# Altium PCB 水温控制系统PCB图.PcbDoc
Units mm, origin at the board's own origin, x right, y up, seen from the top; angles counter-clockwise.
Board outline 83.19 x 88.52 mm, 2 copper layers (Top Layer, Bottom Layer); 38 components, 45 nets, 151 pads, 0 vias.
Unrouted connection lines stored in the file: 2.
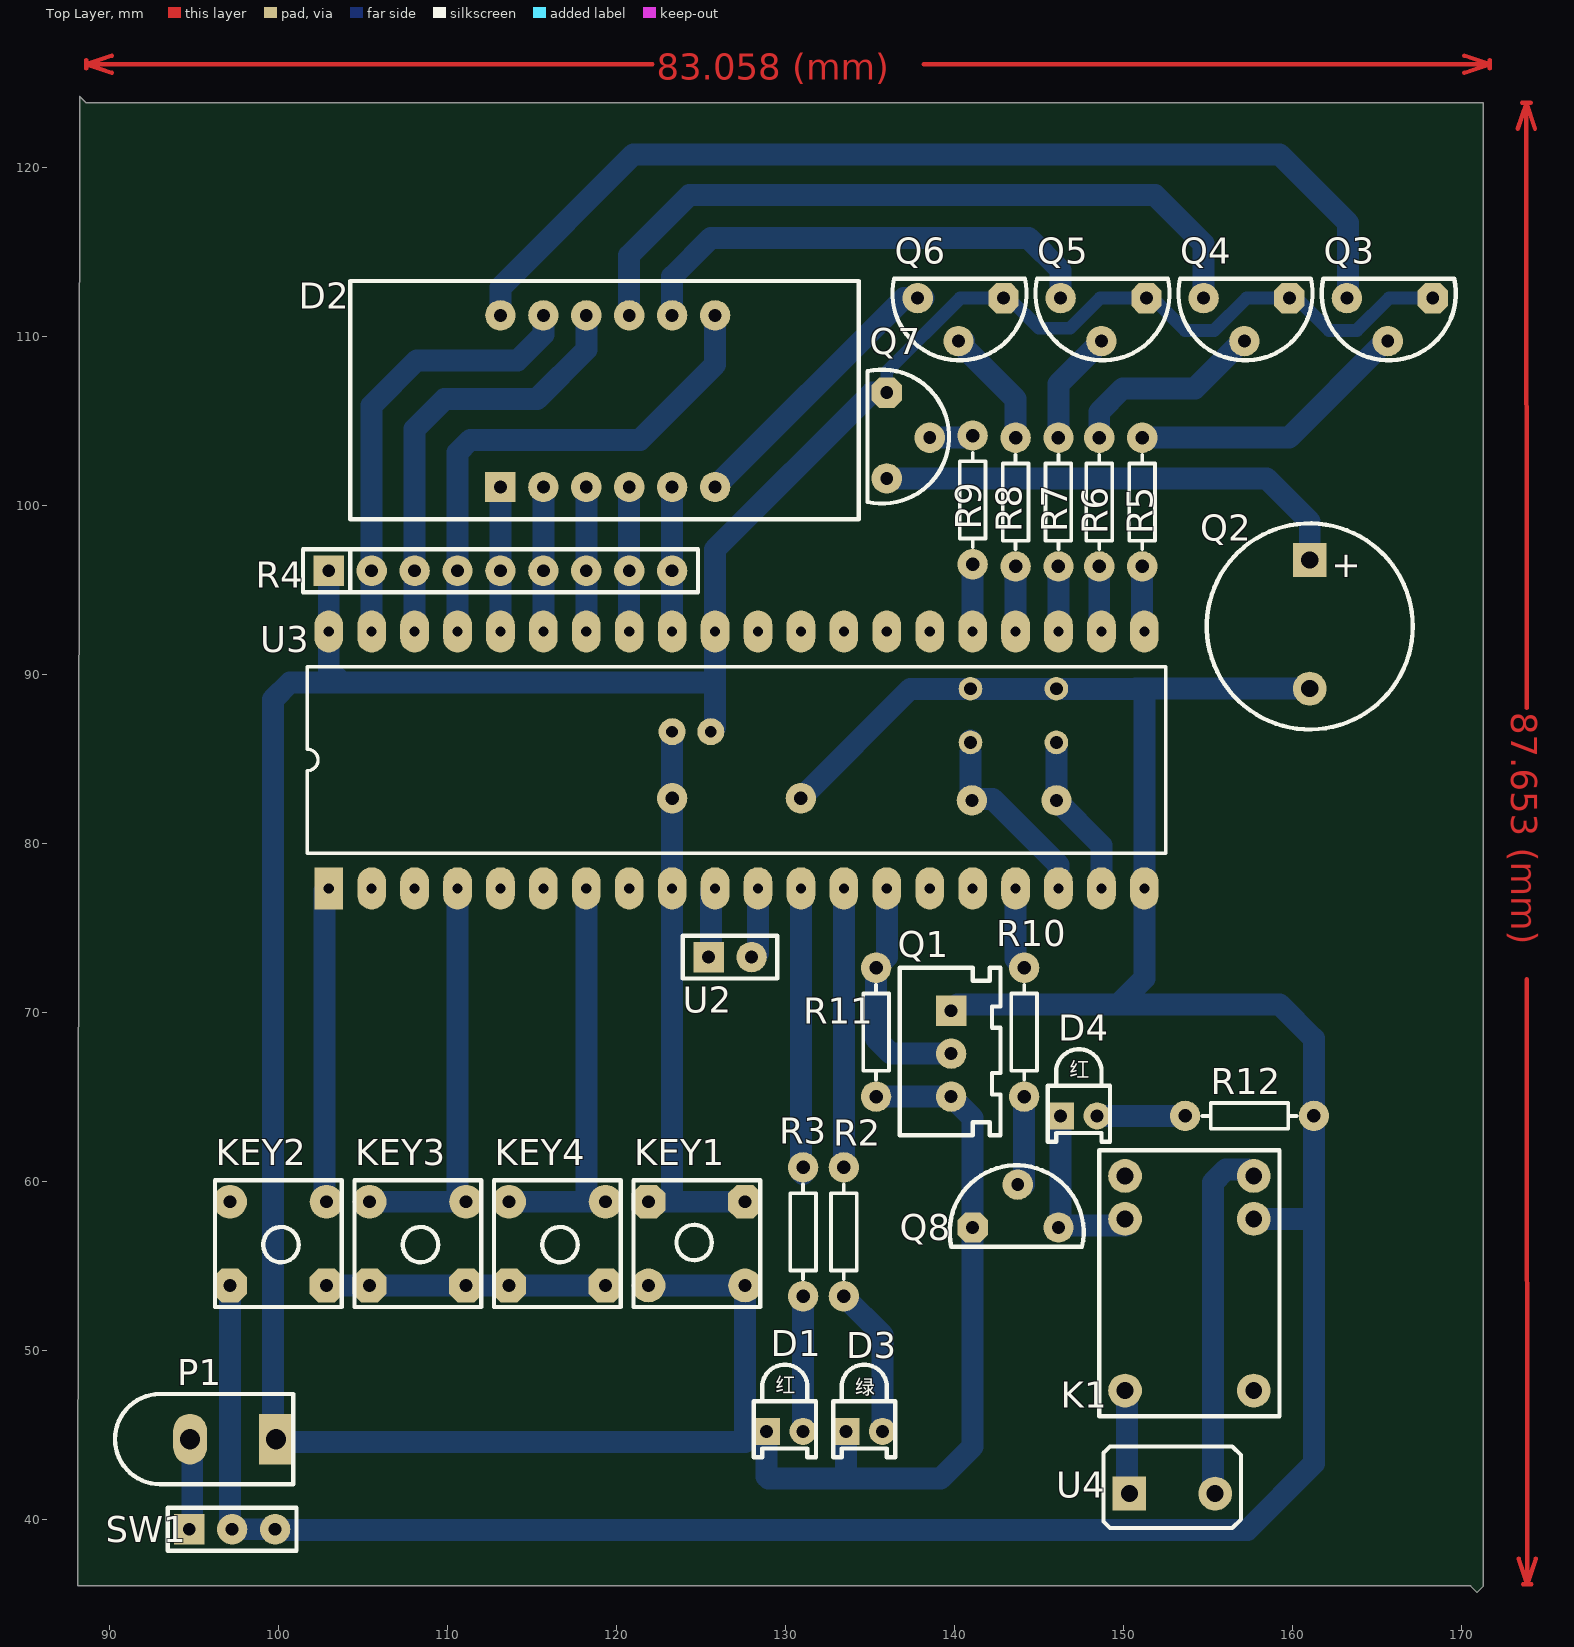
[diagram p0: Top Layer view]
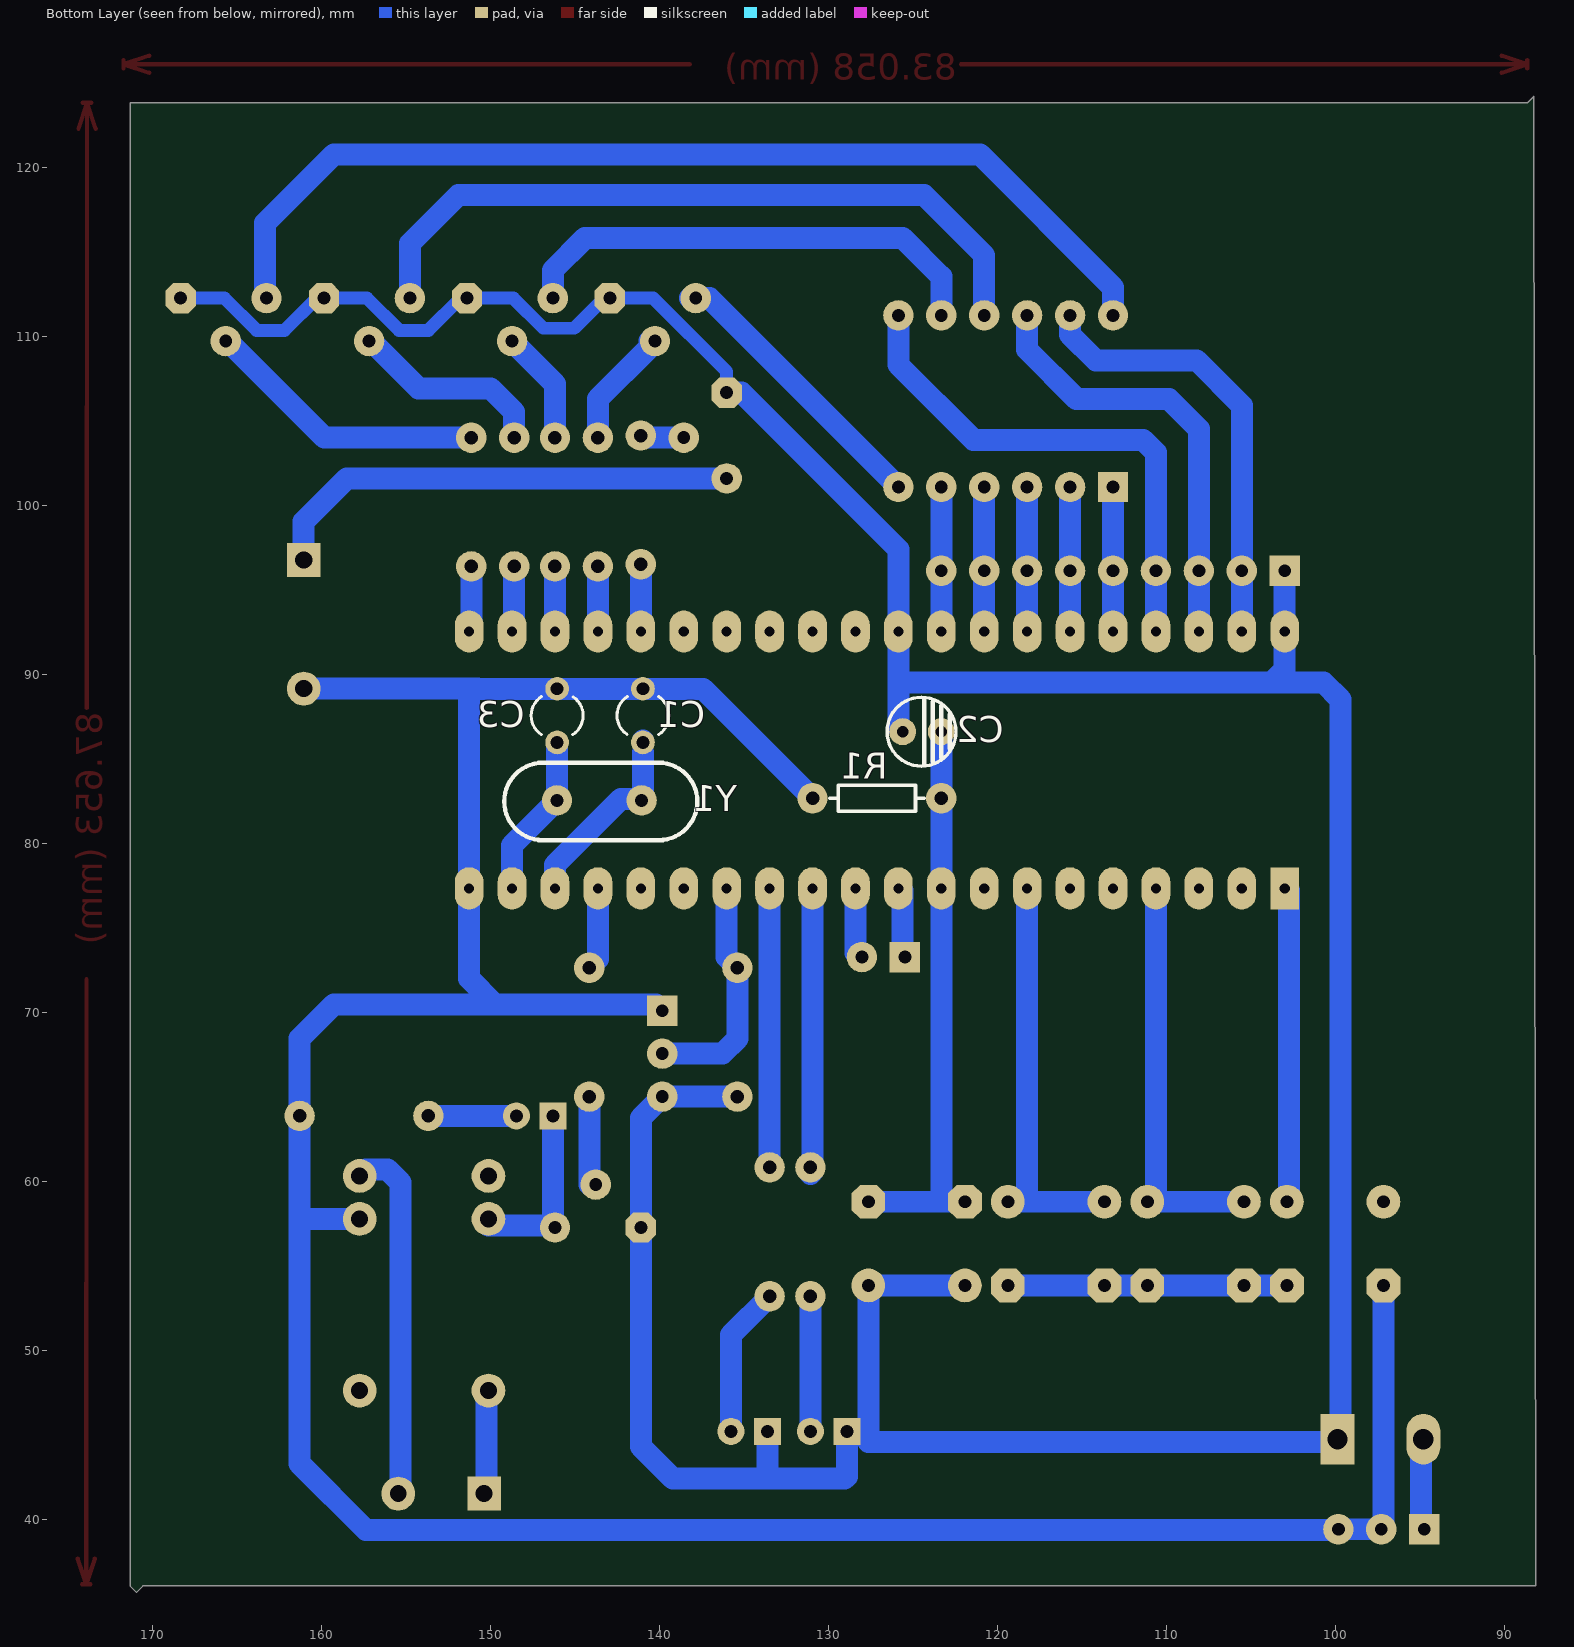
[diagram p1: Bottom Layer view, seen from below]

## Layer stack, top to bottom
Top Layer: signal copper 0.0356
Dielectric: dielectric 0.32, FR-4, Dk 4.8
Bottom Layer: signal copper 0.0356

## Board outline
88.265,124.206 88.646,123.825 171.323,123.825 171.323,36.068 170.942,35.687 170.561,36.068 88.138,36.068

## Design rules (kind name [scope] priority, off if disabled: settings)
Clearance [All] p1: gap=0.254
PolygonConnect [All] p1: connectstyle=Relief reliefconductorwidth=0.254 reliefentries=4 polygonreliefangle="90 Angle"
RoutingVias [All] p1: holewidth=0.711 width=1.27 viastyle="Through Hole" minholewidth=0.711 minwidth=1.27 maxholewidth=0.711 maxwidth=1.27
SilkscreenOverComponentPads [All] p1: minsilkscreentomaskgap=0.254
SolderMaskExpansion [All] p1: expansion=0.102
Width [All] p1: maxlimit=1.3 minlimit=0.254 preferedwidth=0.762 bottomlayer_minwidth=0.762 minimp=50.000000 maximp=50.000000 favimp=50.000000
27 further rules are at their usual default settings.

## Components (designator, comment, footprint, x,y, rotation, side; value= is the part's Value field where it differs from the comment)
C1 "30PF" R38 139.319,90.043 r0 bottom
C2 "10UF" CD4 122.301,88.773 r0 bottom
C3 "30PF" R38 147.701,85.09 r180 bottom
D1 "LED-RED" LED-RED 128.016,43.561 r0 top
D2 "4位数码管" 3641B 104.14,99.06 r0 top
D3 "LED-GREEN" LED-GREEN 132.715,43.561 r0 top (schematic designator D?)
D4 "LED-RED" LED-RED 145.415,62.23 r0 top
K1 "继电器HK4100F" HK4100F 159.258,46.101 r90 top
KEY1 "复位按键" SW 120.904,52.451 r0 top
KEY2 "设置键" SW 103.886,60.198 r180 top
KEY3 "加值键" SW 112.141,60.198 r180 top
KEY4 "减值键" SW 120.396,60.198 r180 top
P1 "DC-002" DC-002 91.618,38.659 r0 top
Q1 "DS18B20" XH3P 136.652,72.771 r270 top
Q2 "蜂鸣器" 蜂鸣器 161.036,96.774 r270 top
Q3 "S8550" 三极管 169.85,113.538 r180 top
Q4 "S8550" 三极管 161.366,113.538 r180 top
Q5 "S8550" 三极管 152.908,113.538 r180 top
Q6 "S8550" 三极管 144.45,113.538 r180 top
Q7 "S8550" 三极管 134.747,108.204 r270 top
Q8 "S8550" 三极管 139.573,56.007 r0 top
R1 "10K" AXIAL-0.3 131.953,81.661 r180 bottom
R2 "1K" AXIAL-0.3 132.461,61.849 r270 top
R3 "1K" AXIAL-0.3 130.048,61.849 r270 top
R4 "10k" R*9 101.346,94.742 r0 top
R5 "1K" AXIAL-0.3 152.146,95.377 r90 top
R6 "1K" AXIAL-0.3 149.606,95.377 r90 top
R7 "1K" AXIAL-0.3 147.193,95.377 r90 top
R8 "1K" AXIAL-0.3 144.653,95.377 r90 top
R9 "1K" AXIAL-0.3 142.113,95.504 r90 top
R10 "1K" AXIAL-0.3 145.161,64.008 r90 top
R11 "10K" AXIAL-0.3 134.366,73.66 r270 top
R12 "1K" AXIAL-0.3 162.306,64.897 r180 top
SW1 "双掷开关" SS12D07G5 93.345,38.024 r0 top
U2 "下载口" HDR2 123.825,71.882 r0 top
U3 "STC89C51" DIP40 102.997,77.343 r90 top
U4 "接线柱" KF301-2P 148.717,39.37 r0 top
Y1 "12MHZ" XTAL 146.05,82.55 r180 bottom

## Footprints (in the part's own frame and the unit in brackets; to place one, negate y for a bottom-side part, rotate by r counter-clockwise, add the part's x,y. Pads: shape width x height; smd on the part's side, far side on the other; paste and mask are expansions set on the pad)
3641B [mil]
  rect 70.87x70.87 hole 30: 1(355,80)
  round 70.87 hole 30: 2(455,80) 3(555,80) 4(655,80) 5(755,80) 6(855,80) 7(855,480) 8(755,480) 9(655,480) 10(555,480) 11(455,480) 12(355,480)
  silkscreen extent 5,5 1190,560
AXIAL-0.3 [mm]
  round 1.8 hole 0.8: 1(1.016,1.016) 2(8.636,1.016)
  silkscreen extent 2.03,0.25 7.62,1.78
CD4 [mm]
  round 1.6 hole 0.7: 1(3.302,2.159) 2(1.016,2.159)
  silkscreen extent 0.15,0.12 4.23,4.2
DC-002 [mm]
  rect 2x3 hole 1.2: 1(8.255,6.096)
  oval 2x3 hole 1.2: 2(3.175,6.096)
  silkscreen extent -1.27,3.43 9.27,8.76
DIP40 [mm]
  rect 2.5x1.7 hole 0.6: 1(0,0)
  oval 2.5x1.7 hole 0.6: 2(0,-2.54) 3(0,-5.08) 4(0,-7.62) 5(0,-10.16) 6(0,-12.7) 7(0,-15.24) 8(0,-17.78) 9(0,-20.32) 10(0,-22.86) 11(0,-25.4) 12(0,-27.94) 13(0,-30.48) 14(0,-33.02) 15(0,-35.56) 16(0,-38.1) 17(0,-40.64) 18(0,-43.18) 19(0,-45.72) 20(0,-48.26) 21(15.2,-48.26) 22(15.2,-45.72) 23(15.2,-43.18) 24(15.2,-40.64) 25(15.2,-38.1) 26(15.2,-35.56) 27(15.2,-33.02) 28(15.2,-30.48) 29(15.2,-27.94) 30(15.2,-25.4) 31(15.2,-22.86) 32(15.2,-20.32) 33(15.2,-17.78) 34(15.2,-15.24) 35(15.2,-12.7) 36(15.2,-10.16) 37(15.2,-7.62) 38(15.2,-5.08) 39(15.2,-2.54) 40(15.2,0)
  silkscreen extent 2.08,-49.53 13.12,1.27
HDR2 [mil]
  rect 70.87x70.87 hole 30: 1(65,55)
  round 70.87 hole 30: 2(165,55)
  silkscreen extent 5,5 225,105
HK4100F [mm]
  round 2 hole 1: 1(1.524,9.144) 2(11.684,9.144) 3(14.224,9.144) 4(14.224,1.524) 5(11.684,1.524) 6(1.524,1.524)
  silkscreen extent 0,0 15.75,10.67
KF301-2P [mm]
  rect 2x2 hole 1: 1(1.651,2.159)
  round 2 hole 1: 2(6.731,2.159)
  silkscreen extent 0.13,0.13 8.25,4.95
LED-GREEN [mil]
  rect 62.99x62.99 hole 30: 1(35,65)
  round 62.99 hole 30: 2(120,65)
  silkscreen extent 5,5 150,220
LED-RED [mil]
  rect 62.99x62.99 hole 30: 1(35,65)
  round 62.99 hole 30: 2(120,65)
  silkscreen extent 5,5 150,220
R38 [mil]
  round 55.12 hole 30: 1(65,160) 2(65,35)
  silkscreen extent 4,53 126,142
R*9 [mil]
  rect 70.87x70.87 hole 30: 1(65,55)
  round 70.87 hole 30: 2(165,55) 3(265,55) 4(365,55) 5(465,55) 6(565,55) 7(665,55) 8(765,55) 9(865,55)
  silkscreen extent 5,5 925,105
SS12D07G5 [mil]
  rect 70.87x70.87 hole 30: 1(55,55)
  round 70.87 hole 30: 2(155,55) 2(255,55)
  silkscreen extent 5,5 305,105
SW [mil]
  oct 78.74x78.74 hole 30: 1(40,250) 1(265,250)
  round 78.74 hole 30: 2(40,55) 2(265,55)
  silkscreen extent 5,5 300,300
XH3P [mm]
  rect 1.8x1.8 hole 0.762: 1(2.667,3.175)
  round 1.8 hole 0.762: 2(5.207,3.175) 3(7.747,3.175)
  silkscreen extent 0.13,0.13 10.03,6.1
XTAL [mm]
  round 1.8 hole 0.76: 1(-0.008,-0.001) 2(4.996,-0.001)
  silkscreen extent -3.13,-2.35 8.3,2.22
三极管 [mm]
  oct 1.8x1.8 hole 0.762: 1(1.524,1.27)
  round 1.8 hole 0.762: 2(4.191,3.81) 3(6.604,1.27)
  silkscreen extent 0.16,0.13 8.09,4.95
蜂鸣器 [mm]
  rect 2x2 hole 1.016: 1(-0.009,0.009)
  round 2 hole 1.016: 2(7.611,0.009)
  silkscreen extent -2.17,-6.08 10.02,6.1

## Nets (pads, with @x,y where several pads share a name; then routed paths per layer and width w, separated by ;. In a path a pad name is that pad's centre, name@x,y a point inside that pad or via, vN(x,y) a via of type N, cw(c..) or ccw(c..) an arc to the next point about the centre after c; other vN are vias at no path point)
GND: C1.2 C3.1 K1.5 KEY2.1 KEY3.1 KEY4.1 Q1.1 Q2.2 R1.1 R12.1 SW1.2 U3.20 | length 200.6
  Bottom Layer w1.3: SW1.2@97.155,39.37 KEY2.1@97.155,53.848 ; SW1.2@97.46,39.421 SW1.2@100,39.421 ; SW1.2@99.695,39.37 157.353,39.37 161.29,43.307 161.29,58.039 ; KEY2.1@102.87,53.848 105.41,53.848 111.125,53.848 113.665,53.848 KEY4.1@119.38,53.848 ; R1.1 137.414,89.154 151.384,89.154 ; Q1.1 140.208,70.485 149.733,70.485 ; 150.758,89.163 Q2.2 ; 151.257,89.027 151.257,77.47 151.257,72.009 149.733,70.485 ; K1.5 161.036,57.785 161.29,58.039 ; 149.733,70.485 159.258,70.485 161.29,68.453 R12.1 161.29,58.039
NetC1_1: C1.1 U3.18 Y1.2 | length 11
  Bottom Layer w1.3: C1.1@140.97,85.386 140.97,82.634 142.283,82.634 146.177,78.74 U3.18@146.177,77.47 ; C1.1 C1.1@140.97,86.106
NetC2_2: C2.2 KEY1.1 R1.2 U3.9 | length 33.5
  Bottom Layer w1.3: KEY1.1@121.92,58.801 123.317,58.801 ; C2.2 R1.2 123.317,77.47 123.317,58.801 ; KEY1.1@127.635,58.801 123.317,58.801
NetC3_2: C3.2 U3.19 Y1.1 | length 9.6
  Bottom Layer w1.3: C3.2 146.05,82.557 Y1.1 148.717,79.89 U3.19@148.717,77.47
NetD1_2: D1.2 R3.2 | length 7.7
  Bottom Layer w1.3: D1.2 R3.2@131.064,52.959
NetD2_1: D2.1 R4.5 U3.36 | length 8.4
  Bottom Layer w1.3: U3.36@113.157,92.67 R4.5 D2.1
NetD2_2: D2.2 R4.6 U3.35 | length 8.4
  Bottom Layer w1.3: U3.35@115.697,92.67 R4.6 D2.2
NetD2_3: D2.3 R4.7 U3.34 | length 8.4
  Bottom Layer w1.3: U3.34@118.237,92.67 R4.7 D2.3
NetD2_4: D2.4 R4.8 U3.33 | length 8.4
  Bottom Layer w1.3: U3.33@120.777,92.67 R4.8 D2.4
NetD2_5: D2.5 R4.9 U3.32 | length 8.4
  Bottom Layer w1.3: U3.32@123.317,92.67 R4.9 D2.5
NetD2_6: D2.6 Q6.3 | length 16.9
  Bottom Layer w1.3: D2.6 137.033,112.268 Q6.3@138.176,112.268
NetD2_7: D2.7 R4.4 U3.37 | length 30.8
  Bottom Layer w1.3: U3.37@110.617,92.67 R4.4 110.617,103.124 111.379,103.886 121.412,103.886 125.857,108.331 D2.7
NetD2_8: D2.8 Q5.3 | length 28.7
  Bottom Layer w1.3: D2.8 123.317,113.538 125.603,115.824 144.399,115.824 146.304,113.919 Q5.3
NetD2_9: D2.9 Q4.3 | length 43.4
  Bottom Layer w1.3: D2.9 120.777,114.808 124.333,118.364 151.892,118.364 154.762,115.494 Q4.3
NetD2_10: D2.10 R4.3 U3.38 | length 26
  Bottom Layer w1.3: U3.38@108.077,92.67 R4.3 108.077,104.521 109.855,106.299 115.316,106.299 118.237,109.22 D2.10
NetD2_11: D2.11 R4.2 U3.39 | length 26.3
  Bottom Layer w1.3: U3.39@105.537,92.67 R4.2 105.537,105.918 108.204,108.585 114.173,108.585 115.697,110.109 D2.11
NetD2_12: D2.12 Q3.3 | length 60.8
  Bottom Layer w1.3: D2.12 113.157,112.903 121.031,120.777 159.258,120.777 163.322,116.713 Q3.3@163.322,112.649
NetD3_2: D3.2 R2.2 | length 8.9
  Bottom Layer w1.3: R2.2 135.763,50.927 D3.2
NetD4_1: D4.1 K1.2 Q8.3 | length 10.3
  Bottom Layer w1.3: D4.1 146.304,57.404 K1.2@150.114,57.404
NetD4_2: D4.2 R12.2 | length 5.2
  Bottom Layer w1.3: D4.2 R12.2
NetK1_1: K1.1 U4.1 | length 5.8
  Bottom Layer w1.3: U4.1@150.241,41.275 K1.1@150.241,47.117
NetK1_4: K1.4 U4.2 | length 20.8
  Bottom Layer w1.3: U4.2@155.321,41.529 155.321,59.944 156.083,60.706 K1.4@157.353,60.706
NetKEY2_2: KEY2.2 U3.1 | length 18.6
  Bottom Layer w1.3: KEY2.2@102.743,58.928 102.743,77.216 U3.1@102.997,77.47
NetKEY3_2: KEY3.2 U3.4 | length 24.6
  Bottom Layer w1.3: KEY3.2@105.41,58.801 111.125,58.801 110.617,59.309 U3.4@110.617,77.47
NetKEY4_2: KEY4.2 U3.7 | length 23.6
  Bottom Layer w1.3: KEY4.2@113.665,58.801 118.491,58.801 118.237,59.055 U3.7@118.237,77.47
NetP1_2: P1.2 SW1.1 | length 5.2
  Bottom Layer w1.3: SW1.1@94.92,39.421 P1.2@94.92,44.628
NetQ1_2: Q1.2 R11.1 U3.14 | length 14.1
  Bottom Layer w1.3: U3.14@136.017,77.47 136.017,73.279 R11.1 135.382,68.453 136.271,67.564 Q1.2
NetQ2_1: Q2.1 Q7.3 | length 28.4
  Bottom Layer w1.3: Q7.3 158.496,101.6 161.045,99.051 Q2.1
NetQ3_2: Q3.2 R5.2 | length 16.8
  Bottom Layer w1.3: R5.2 159.817,104.013 Q3.2@165.532,109.728
NetQ4_2: Q4.2 R6.2 | length 11.7
  Bottom Layer w1.3: R6.2 148.59,105.537 149.987,106.934 154.254,106.934 Q4.2@157.048,109.728
NetQ5_2: Q5.2 R7.2 | length 6.7
  Bottom Layer w1.3: R7.2 146.177,107.188 148.488,109.499 Q5.2@148.488,109.728
NetQ6_2: Q6.2 R8.2 | length 7
  Bottom Layer w1.3: Q6.2@140.589,109.728 140.589,109.347 143.637,106.299 R8.2
NetQ7_2: Q7.2 R9.2 | length 2.6
  Bottom Layer w1.3: Q7.2 140.97,104.013 R9.2
NetQ8_2: Q8.2 R10.1 | length 5.2
  Bottom Layer w1.3: Q8.2@144.145,59.817 R10.1
NetR2_1: R2.1 U3.13 | length 16.6
  Bottom Layer w1.3: R2.1 U3.13@133.477,77.47
NetR3_1: R3.1 U3.12 | length 17.1
  Bottom Layer w1.3: U3.12@130.937,77.47 130.937,60.579 R3.1@131.064,60.452
NetR5_1: R5.1 U3.21 | length 3.6
  Bottom Layer w1.3: U3.21@151.13,92.797 R5.1
NetR6_1: R6.1 U3.22 | length 3.6
  Bottom Layer w1.3: U3.22@148.59,92.797 R6.1
NetR7_1: R7.1 U3.23 | length 3.7
  Bottom Layer w1.3: U3.23@146.177,92.67 R7.1
NetR8_1: R8.1 U3.24 | length 3.7
  Bottom Layer w1.3: U3.24@143.637,92.67 R8.1
NetR9_1: R9.1 U3.25 | length 3.8
  Bottom Layer w1.3: U3.25@141.097,92.67 R9.1
NetR10_2: R10.2 U3.17 | length 5
  Bottom Layer w1.3: U3.17@143.637,77.47 143.637,73.152 R10.2
NetU2_1: U2.1 U3.10 | length 4.3
  Bottom Layer w1.3: U2.1@125.603,73.279 125.603,77.216 U3.10@125.857,77.47
NetU2_2: U2.2 U3.11 | length 4.3
  Bottom Layer w1.3: U2.2@128.143,73.279 128.397,73.533 U3.11@128.397,77.47
VCC: C2.1 D1.1 D3.1 KEY1.2 P1.1 Q1.3 Q3.1 Q4.1 Q5.1 Q6.1 Q7.1 Q8.1 R4.1 R11.2 U3.31 U3.40 | length 229.6
  Bottom Layer w0.762: Q7.1 136.017,107.925 140.36,112.268 143.256,112.268 145.034,110.49 146.863,110.49 148.641,112.268 151.765,112.268 153.67,110.363 155.397,110.363 157.302,112.268 160.274,112.268 162.179,110.363 163.83,110.363 165.735,112.268 Q3.1@168.783,112.268
  Bottom Layer w1.3: R4.1 102.997,90.297 103.759,89.535 ; KEY1.2@121.92,53.848 127.635,53.848 127.635,44.577 99.695,44.577 99.695,88.519 100.711,89.535 103.759,89.535 ; C2.1 125.857,86.868 125.857,89.535 ; D1.1 128.905,42.545 129.032,42.418 139.192,42.418 141.097,44.323 Q8.1 141.097,63.754 Q1.3 R11.2 ; 133.604,42.672 D3.1 ; Q7.1 135.128,106.68 125.857,97.409 125.857,89.535 ; 103.759,89.535 125.857,89.535
pads on no net: K1.3 K1.6 U3.2 U3.3 U3.5 U3.6 U3.8 U3.15 U3.16 U3.26 U3.27 U3.28 U3.29 U3.30
copper on no net: | length 153.5
  Top Layer w0.254: 88.646,125.857 88.646,126.365 ; 90.17,125.603 88.646,126.111 ; 90.17,126.619 88.646,126.111 ; 122.151,126.111 88.646,126.111 ; 138.199,126.111 171.704,126.111 ; 170.18,125.603 171.704,126.111 ; 170.18,126.619 171.704,126.111 ; 171.704,125.857 171.704,126.365 ; 173.356,122.301 173.863,123.825 ; 173.406,37.695 173.915,36.172 ; 173.609,123.825 174.117,123.825 ; 173.661,36.172 174.169,36.172 ; 173.884,88.022 173.863,123.825 ; 173.894,71.974 173.915,36.172 ; 174.372,122.301 173.863,123.825 ; 174.422,37.696 173.915,36.172

## Other copper
Top Layer:
  text "83.058 (mm)" at 122.405,125.197 h1.52
  text "87.653 (mm)" at 172.97,87.768 h1.52 r270.03

## Silkscreen, mask and mechanical layers (free items; w line width, h text height)
Mechanical 1:
  lines w1.3: 88.519,36.322 88.519,123.698 171.704,123.698 171.704,36.322 88.519,36.322

## Text inside footprints (layer, text, board x,y; h text height)
D1: Top Overlay "红" at 129.413,47.244 h1.52
D3: Top Overlay "绿" at 134.112,47.117 h1.52
D4: Top Overlay "红" at 146.812,65.913 h1.52
Q2: Top Overlay "+" at 162.569,97.291 h1.52 r270